# EAGLE board Qwiic Joystick-Panel (EAGLE 9.0.1), part 1 of 2
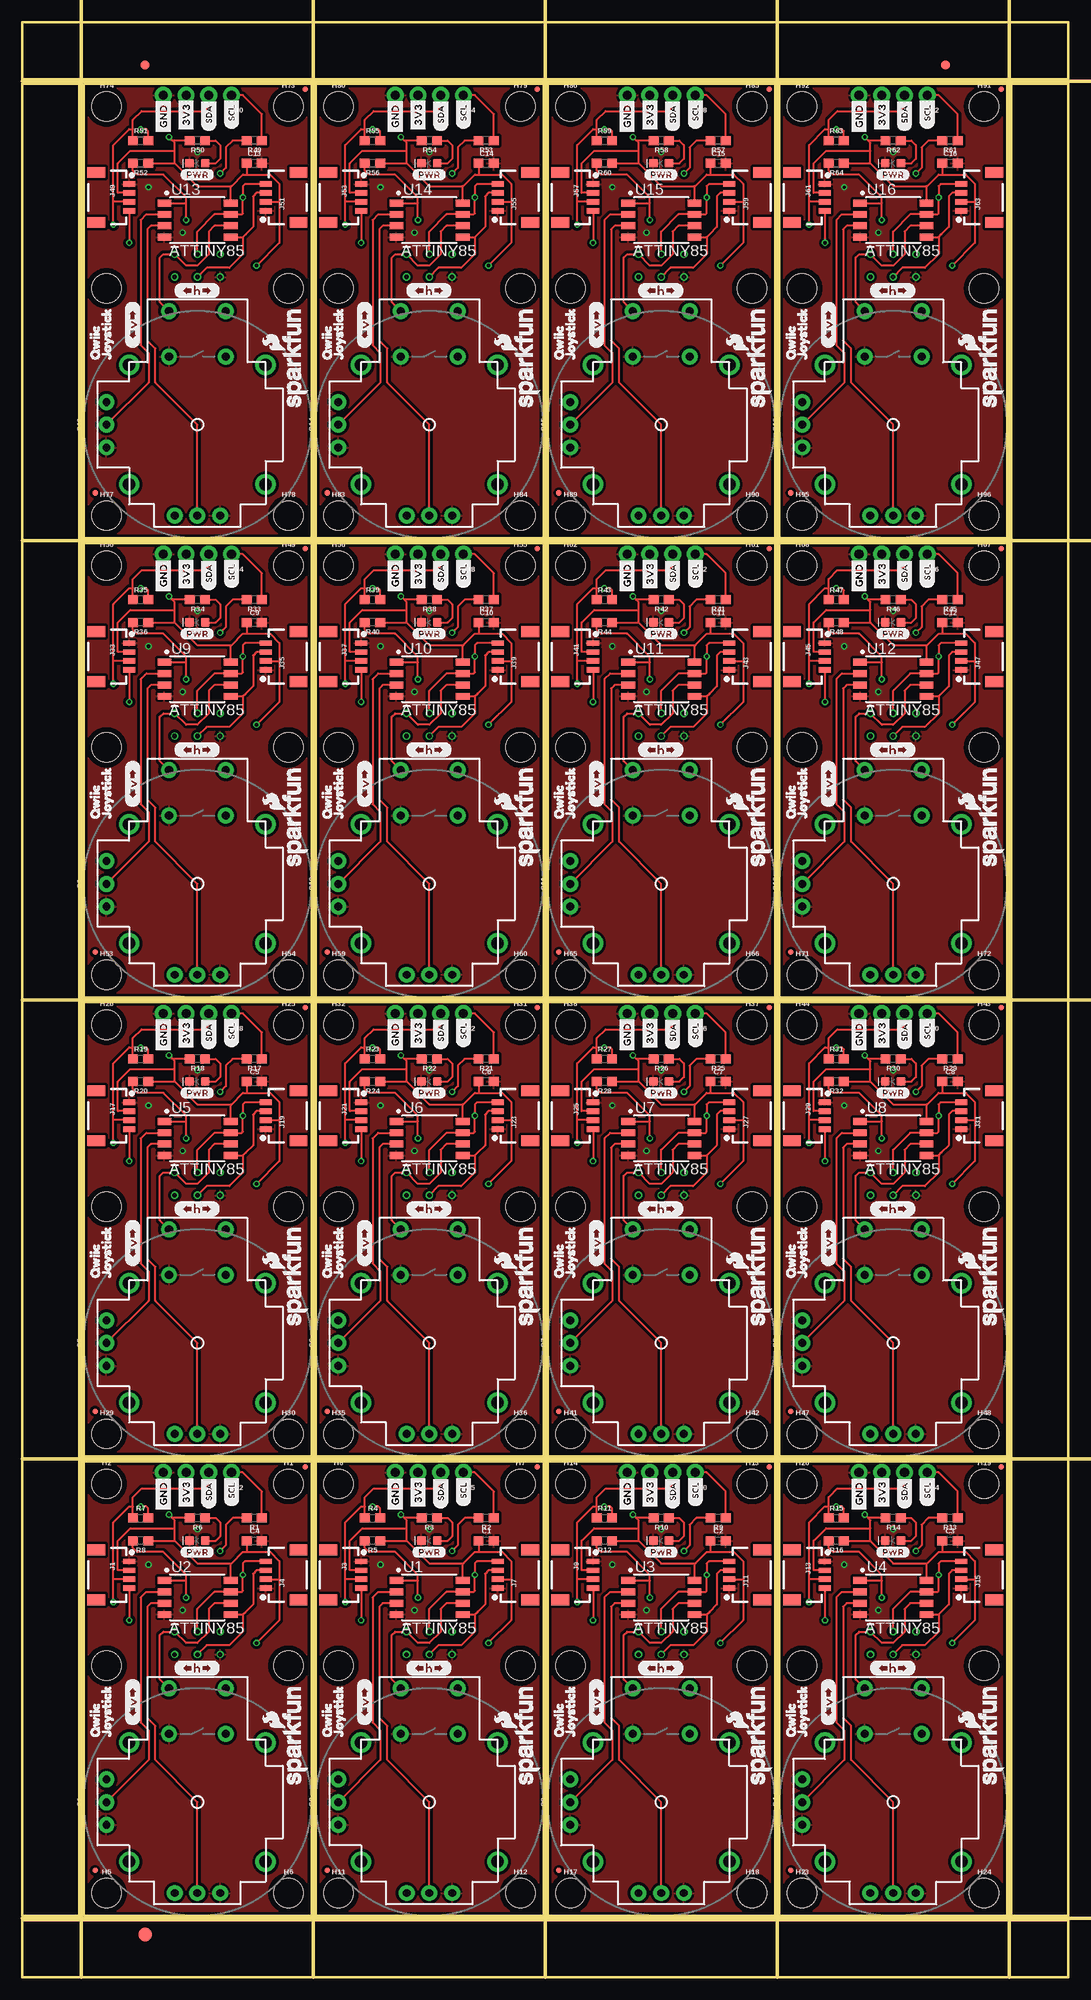
[diagram p0: board, top side]
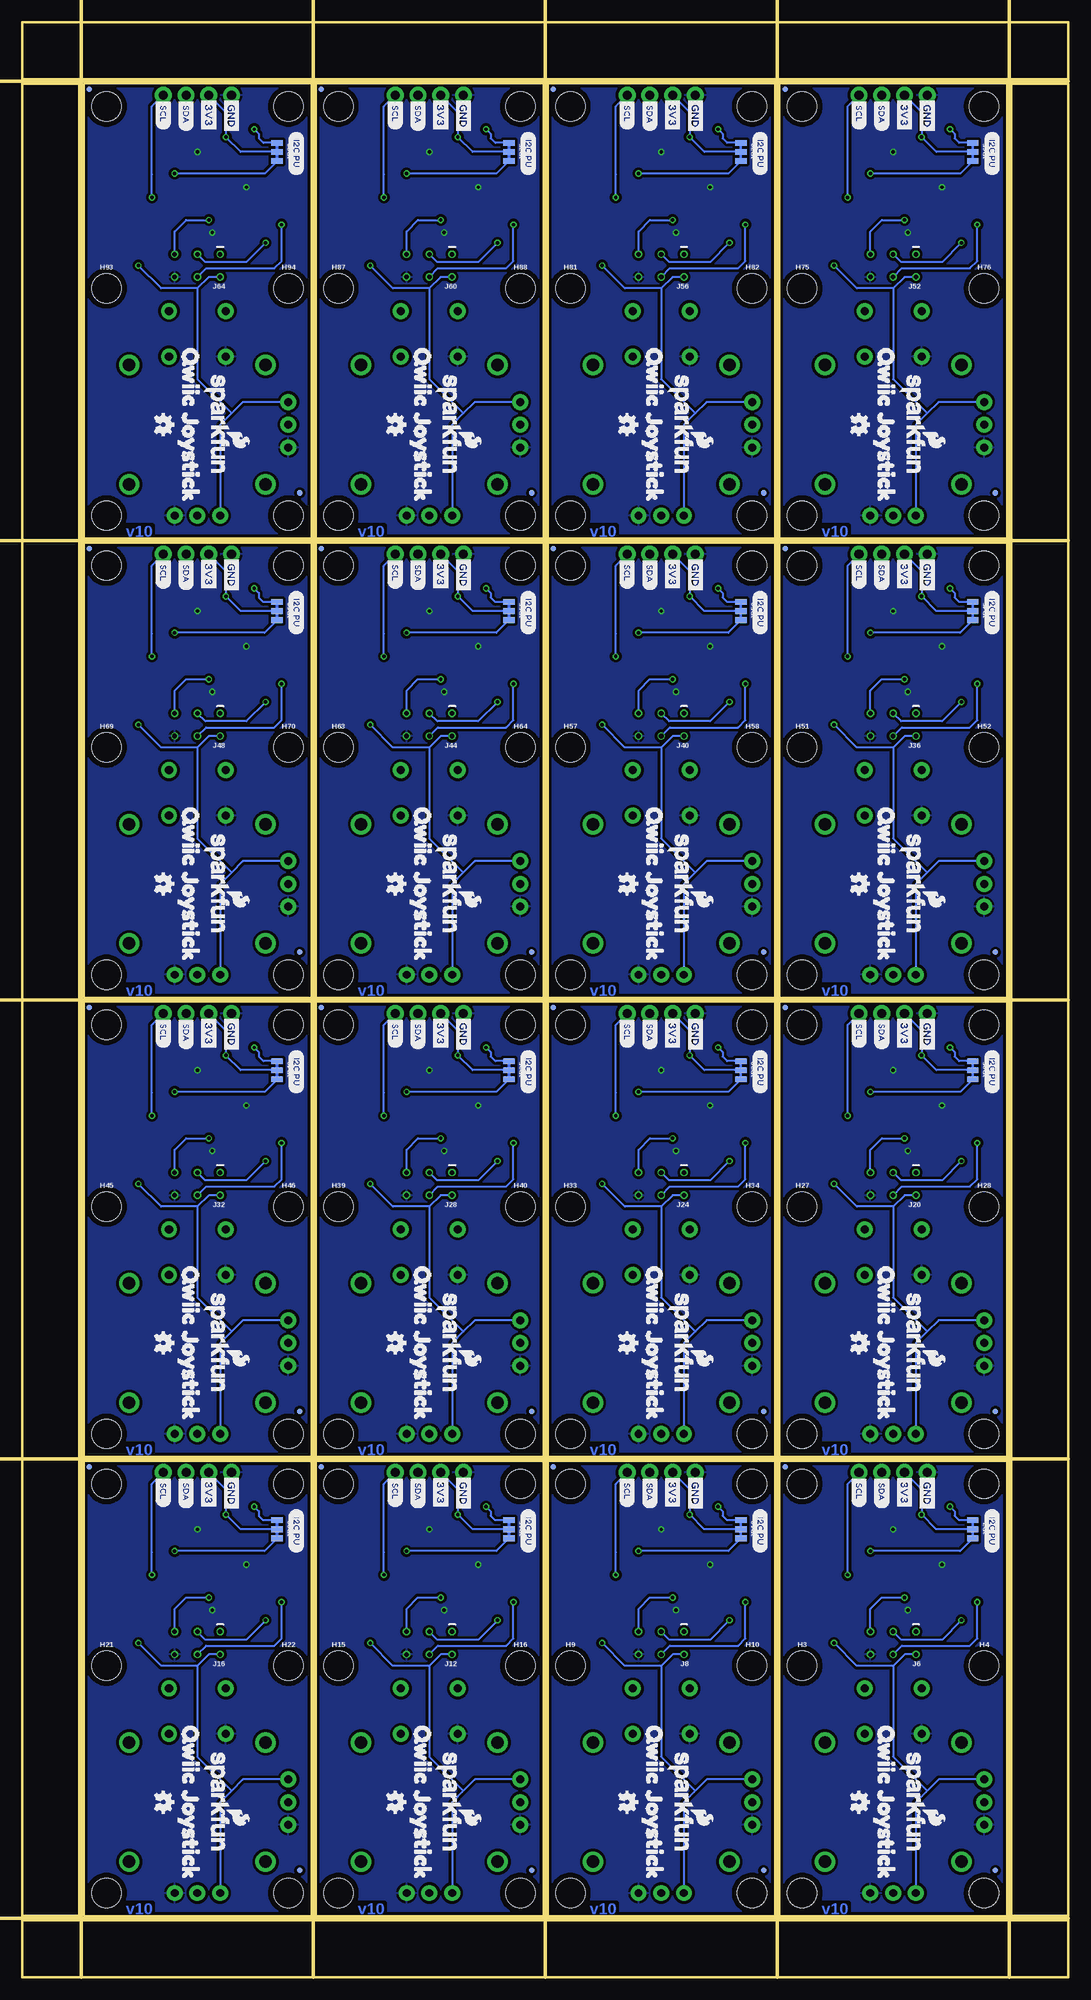
[diagram p1: board, bottom side, seen from below]

Size 116.84 x 218.44 mm. Coordinates in mm from the lower left corner, seen from the top.
Outline: 6.86,57.66 6.86,6.86 32.26,6.86 32.26,57.66 6.86,57.66
Outline: 32.77,57.66 32.77,6.86 58.17,6.86 58.17,57.66 32.77,57.66
Outline: 58.67,57.66 58.67,6.86 84.07,6.86 84.07,57.66 58.67,57.66
Outline: 84.58,57.66 84.58,6.86 109.98,6.86 109.98,57.66 84.58,57.66
Outline: 6.86,108.97 6.86,58.17 32.26,58.17 32.26,108.97 6.86,108.97
Outline: 32.77,108.97 32.77,58.17 58.17,58.17 58.17,108.97 32.77,108.97
Outline: 58.67,108.97 58.67,58.17 84.07,58.17 84.07,108.97 58.67,108.97
Outline: 84.58,108.97 84.58,58.17 109.98,58.17 109.98,108.97 84.58,108.97
Outline: 6.86,160.27 6.86,109.47 32.26,109.47 32.26,160.27 6.86,160.27
Outline: 32.77,160.27 32.77,109.47 58.17,109.47 58.17,160.27 32.77,160.27
Outline: 58.67,160.27 58.67,109.47 84.07,109.47 84.07,160.27 58.67,160.27
Outline: 84.58,160.27 84.58,109.47 109.98,109.47 109.98,160.27 84.58,160.27
Outline: 6.86,211.58 6.86,160.78 32.26,160.78 32.26,211.58 6.86,211.58
Outline: 32.77,211.58 32.77,160.78 58.17,160.78 58.17,211.58 32.77,211.58
Outline: 58.67,211.58 58.67,160.78 84.07,160.78 84.07,211.58 58.67,211.58
Outline: 84.58,211.58 84.58,160.78 109.98,160.78 109.98,211.58 84.58,211.58
Outline: 0,6.35 116.84,6.35 116.84,0 0,0 0,6.35
Outline: 110.49,211.58 116.84,211.58 116.84,6.86 110.49,6.86 110.49,211.58
Outline: 0,218.44 116.84,218.44 116.84,212.09 0,212.09 0,218.44
Outline: 0,211.58 6.35,211.58 6.35,6.86 0,6.86 0,211.58
Copper layers (1*16): Top 0.035mm / dielectric 1.5mm / Bottom 0.035mm
Design rules "SparkFun-2-layer-PCBWay-LIMIT": minimum track width 6mil, minimum drill 0.3mm, track to track 6mil, track to pad 6mil, pad to pad 6mil, via to via 6mil, smd to smd 6mil, copper to edge 6mil, drill to drill 6mil, minimum pad ring 6mil, minimum via ring 6mil, stop-mask expansion 4mil, vias tented up to drill 25mil, thermal gap 10mil
Milling: 10 lines

## Footprints (pad centres in the part's own frame; a part is rotated, then mirrored left to right if it is on the bottom)
0603 = smd 1.1 x 1: 1 -0.85,0; 2 0.85,0
LED-0603 = smd 1 x 1: A -0.877,0; C 0.877,0
FIDUCIAL-1X2 = smd 1 x 1: 1 0,0
FIDUCIAL-1.5X3 = smd 1.5 x 1.5: 1 0,0
STAND-OFF = hole 3.302: 0,0
1X04_1MM_RA = smd 0.6 x 1.35: 1 -1.5,0; 2 -0.5,0; 3 0.5,0; 4 1.5,0 | smd 1.2 x 2: NC1 2.8,-3.675; NC2 -2.8,-3.675
1X04_NO_SILK = drill 1.016 pad 1.88: 1 0,0; 2 2.54,0; 3 5.08,0; 4 7.62,0
2X3_TEST_POINTS = drill 0.508: 1 -2.54,-1.27; 2 -2.54,1.27; 3 0,-1.27; 4 0,1.27; 5 2.54,-1.27; 6 2.54,1.27
MICRO-FIDUCIAL = smd 0.635 x 0.635: 1 0,0
SMT-JUMPER_3_2-NC_TRACE_NO-SILK = smd 0.635 x 1.27: 1 -1.016,0; 2 0,0; 3 1.016,0
JOYSTICK = drill 0.9 pad 1.778: B1A -3.175,12.7; B1B 3.175,12.7; B2A -3.175,7.62; B2B 3.175,7.62 | drill 0.889 pad 1.778: H1 -2.54,-10.16; H2 0,-10.16; H3 2.54,-10.16; V1 -10.16,2.54; V2 -10.16,0; V3 -10.16,-2.54 | drill 1.397 pad 2.286: MOUNT1 -7.62,6.668; MOUNT2 -7.62,-6.668; MOUNT3 7.62,-6.668; MOUNT4 7.62,6.668
ATTINY85 = smd 1.524 x 0.762: 1 -3.683,1.905; 2 -3.683,0.635; 3 -3.683,-0.635; 4 -3.683,-1.905; 5 3.727,-1.905; 6 3.727,-0.635; 7 3.727,0.635; 8 3.727,1.905

## Placement (x,y rotation side)
C1  0.1uF  [0603]  51.82,48.77 0 top
C2  0.1uF  [0603]  77.72,48.77 0 top
C3  0.1uF  [0603]  103.63,48.77 0 top
C4  0.1uF  [0603]  25.91,48.77 0 top
C5  0.1uF  [0603]  25.91,100.08 0 top
C6  0.1uF  [0603]  51.82,100.08 0 top
C7  0.1uF  [0603]  77.72,100.08 0 top
C8  0.1uF  [0603]  103.63,100.08 0 top
C9  0.1uF  [0603]  25.91,151.38 0 top
C10  0.1uF  [0603]  51.82,151.38 0 top
C11  0.1uF  [0603]  77.72,151.38 0 top
C12  0.1uF  [0603]  103.63,151.38 0 top
C13  0.1uF  [0603]  25.91,202.69 0 top
C14  0.1uF  [0603]  51.82,202.69 0 top
C15  0.1uF  [0603]  77.72,202.69 0 top
C16  0.1uF  [0603]  103.63,202.69 0 top
D1  RED  [LED-0603]  19.56,48.77 180 top
D2  RED  [LED-0603]  45.47,48.77 180 top
D3  RED  [LED-0603]  71.37,48.77 180 top
D4  RED  [LED-0603]  97.28,48.77 180 top
D5  RED  [LED-0603]  19.56,100.08 180 top
D6  RED  [LED-0603]  45.47,100.08 180 top
D7  RED  [LED-0603]  71.37,100.08 180 top
D8  RED  [LED-0603]  97.28,100.08 180 top
D9  RED  [LED-0603]  19.56,151.38 180 top
D10  RED  [LED-0603]  45.47,151.38 180 top
D11  RED  [LED-0603]  71.37,151.38 180 top
D12  RED  [LED-0603]  97.28,151.38 180 top
D13  RED  [LED-0603]  19.56,202.69 180 top
D14  RED  [LED-0603]  45.47,202.69 180 top
D15  RED  [LED-0603]  71.37,202.69 180 top
D16  RED  [LED-0603]  97.28,202.69 180 top
E$1  [FIDUCIAL-1X2]  13.72,213.68 0 top
E$2  [FIDUCIAL-1X2]  103.12,213.68 0 top
E$3  [FIDUCIAL-1.5X3]  13.72,4.76 0 top
H1  STAND-OFF  [STAND-OFF]  29.72,55.12 0 top
H2  STAND-OFF  [STAND-OFF]  9.4,55.12 0 top
H3  STAND-OFF  [STAND-OFF]  29.72,34.8 0 bottom
H4  STAND-OFF  [STAND-OFF]  9.4,34.8 0 bottom
H5  STAND-OFF  [STAND-OFF]  9.4,9.4 0 top
H6  STAND-OFF  [STAND-OFF]  29.72,9.4 0 top
H7  STAND-OFF  [STAND-OFF]  55.63,55.12 0 top
H8  STAND-OFF  [STAND-OFF]  35.31,55.12 0 top
H9  STAND-OFF  [STAND-OFF]  55.63,34.8 0 bottom
H10  STAND-OFF  [STAND-OFF]  35.31,34.8 0 bottom
H11  STAND-OFF  [STAND-OFF]  35.31,9.4 0 top
H12  STAND-OFF  [STAND-OFF]  55.63,9.4 0 top
H13  STAND-OFF  [STAND-OFF]  81.53,55.12 0 top
H14  STAND-OFF  [STAND-OFF]  61.21,55.12 0 top
H15  STAND-OFF  [STAND-OFF]  81.53,34.8 0 bottom
H16  STAND-OFF  [STAND-OFF]  61.21,34.8 0 bottom
H17  STAND-OFF  [STAND-OFF]  61.21,9.4 0 top
H18  STAND-OFF  [STAND-OFF]  81.53,9.4 0 top
H19  STAND-OFF  [STAND-OFF]  107.44,55.12 0 top
H20  STAND-OFF  [STAND-OFF]  87.12,55.12 0 top
H21  STAND-OFF  [STAND-OFF]  107.44,34.8 0 bottom
H22  STAND-OFF  [STAND-OFF]  87.12,34.8 0 bottom
H23  STAND-OFF  [STAND-OFF]  87.12,9.4 0 top
H24  STAND-OFF  [STAND-OFF]  107.44,9.4 0 top
H25  STAND-OFF  [STAND-OFF]  29.72,106.43 0 top
H26  STAND-OFF  [STAND-OFF]  9.4,106.43 0 top
H27  STAND-OFF  [STAND-OFF]  29.72,86.11 0 bottom
H28  STAND-OFF  [STAND-OFF]  9.4,86.11 0 bottom
H29  STAND-OFF  [STAND-OFF]  9.4,60.71 0 top
H30  STAND-OFF  [STAND-OFF]  29.72,60.71 0 top
H31  STAND-OFF  [STAND-OFF]  55.63,106.43 0 top
H32  STAND-OFF  [STAND-OFF]  35.31,106.43 0 top
H33  STAND-OFF  [STAND-OFF]  55.63,86.11 0 bottom
H34  STAND-OFF  [STAND-OFF]  35.31,86.11 0 bottom
H35  STAND-OFF  [STAND-OFF]  35.31,60.71 0 top
H36  STAND-OFF  [STAND-OFF]  55.63,60.71 0 top
H37  STAND-OFF  [STAND-OFF]  81.53,106.43 0 top
H38  STAND-OFF  [STAND-OFF]  61.21,106.43 0 top
H39  STAND-OFF  [STAND-OFF]  81.53,86.11 0 bottom
H40  STAND-OFF  [STAND-OFF]  61.21,86.11 0 bottom
H41  STAND-OFF  [STAND-OFF]  61.21,60.71 0 top
H42  STAND-OFF  [STAND-OFF]  81.53,60.71 0 top
H43  STAND-OFF  [STAND-OFF]  107.44,106.43 0 top
H44  STAND-OFF  [STAND-OFF]  87.12,106.43 0 top
H45  STAND-OFF  [STAND-OFF]  107.44,86.11 0 bottom
H46  STAND-OFF  [STAND-OFF]  87.12,86.11 0 bottom
H47  STAND-OFF  [STAND-OFF]  87.12,60.71 0 top
H48  STAND-OFF  [STAND-OFF]  107.44,60.71 0 top
H49  STAND-OFF  [STAND-OFF]  29.72,157.73 0 top
H50  STAND-OFF  [STAND-OFF]  9.4,157.73 0 top
H51  STAND-OFF  [STAND-OFF]  29.72,137.41 0 bottom
H52  STAND-OFF  [STAND-OFF]  9.4,137.41 0 bottom
H53  STAND-OFF  [STAND-OFF]  9.4,112.01 0 top
H54  STAND-OFF  [STAND-OFF]  29.72,112.01 0 top
H55  STAND-OFF  [STAND-OFF]  55.63,157.73 0 top
H56  STAND-OFF  [STAND-OFF]  35.31,157.73 0 top
H57  STAND-OFF  [STAND-OFF]  55.63,137.41 0 bottom
H58  STAND-OFF  [STAND-OFF]  35.31,137.41 0 bottom
H59  STAND-OFF  [STAND-OFF]  35.31,112.01 0 top
H60  STAND-OFF  [STAND-OFF]  55.63,112.01 0 top
H61  STAND-OFF  [STAND-OFF]  81.53,157.73 0 top
H62  STAND-OFF  [STAND-OFF]  61.21,157.73 0 top
H63  STAND-OFF  [STAND-OFF]  81.53,137.41 0 bottom
H64  STAND-OFF  [STAND-OFF]  61.21,137.41 0 bottom
H65  STAND-OFF  [STAND-OFF]  61.21,112.01 0 top
H66  STAND-OFF  [STAND-OFF]  81.53,112.01 0 top
H67  STAND-OFF  [STAND-OFF]  107.44,157.73 0 top
H68  STAND-OFF  [STAND-OFF]  87.12,157.73 0 top
H69  STAND-OFF  [STAND-OFF]  107.44,137.41 0 bottom
H70  STAND-OFF  [STAND-OFF]  87.12,137.41 0 bottom
H71  STAND-OFF  [STAND-OFF]  87.12,112.01 0 top
H72  STAND-OFF  [STAND-OFF]  107.44,112.01 0 top
H73  STAND-OFF  [STAND-OFF]  29.72,209.04 0 top
H74  STAND-OFF  [STAND-OFF]  9.4,209.04 0 top
H75  STAND-OFF  [STAND-OFF]  29.72,188.72 0 bottom
H76  STAND-OFF  [STAND-OFF]  9.4,188.72 0 bottom
H77  STAND-OFF  [STAND-OFF]  9.4,163.32 0 top
H78  STAND-OFF  [STAND-OFF]  29.72,163.32 0 top
H79  STAND-OFF  [STAND-OFF]  55.63,209.04 0 top
H80  STAND-OFF  [STAND-OFF]  35.31,209.04 0 top
H81  STAND-OFF  [STAND-OFF]  55.63,188.72 0 bottom
H82  STAND-OFF  [STAND-OFF]  35.31,188.72 0 bottom
H83  STAND-OFF  [STAND-OFF]  35.31,163.32 0 top
H84  STAND-OFF  [STAND-OFF]  55.63,163.32 0 top
H85  STAND-OFF  [STAND-OFF]  81.53,209.04 0 top
H86  STAND-OFF  [STAND-OFF]  61.21,209.04 0 top
H87  STAND-OFF  [STAND-OFF]  81.53,188.72 0 bottom
H88  STAND-OFF  [STAND-OFF]  61.21,188.72 0 bottom
H89  STAND-OFF  [STAND-OFF]  61.21,163.32 0 top
H90  STAND-OFF  [STAND-OFF]  81.53,163.32 0 top
H91  STAND-OFF  [STAND-OFF]  107.44,209.04 0 top
H92  STAND-OFF  [STAND-OFF]  87.12,209.04 0 top
H93  STAND-OFF  [STAND-OFF]  107.44,188.72 0 bottom
H94  STAND-OFF  [STAND-OFF]  87.12,188.72 0 bottom
H95  STAND-OFF  [STAND-OFF]  87.12,163.32 0 top
H96  STAND-OFF  [STAND-OFF]  107.44,163.32 0 top
J1  [1X04_1MM_RA]  11.94,44.96 270 top
J2  [1X04_NO_SILK]  23.37,56.39 180 top
J3  [1X04_1MM_RA]  37.85,44.96 270 top
J4  [1X04_1MM_RA]  27.18,44.96 90 top
J5  [1X04_NO_SILK]  49.28,56.39 180 top
J6  AVR_SPI_PROG_3X2TESTPOINTS  [2X3_TEST_POINTS]  19.56,37.34 180 bottom
J7  [1X04_1MM_RA]  53.09,44.96 90 top
J8  AVR_SPI_PROG_3X2TESTPOINTS  [2X3_TEST_POINTS]  45.47,37.34 180 bottom
J9  [1X04_1MM_RA]  63.75,44.96 270 top
J10  [1X04_NO_SILK]  75.18,56.39 180 top
J11  [1X04_1MM_RA]  78.99,44.96 90 top
J12  AVR_SPI_PROG_3X2TESTPOINTS  [2X3_TEST_POINTS]  71.37,37.34 180 bottom
J13  [1X04_1MM_RA]  89.66,44.96 270 top
J14  [1X04_NO_SILK]  101.09,56.39 180 top
J15  [1X04_1MM_RA]  104.9,44.96 90 top
J16  AVR_SPI_PROG_3X2TESTPOINTS  [2X3_TEST_POINTS]  97.28,37.34 180 bottom
J17  [1X04_1MM_RA]  11.94,96.27 270 top
J18  [1X04_NO_SILK]  23.37,107.7 180 top
J19  [1X04_1MM_RA]  27.18,96.27 90 top
J20  AVR_SPI_PROG_3X2TESTPOINTS  [2X3_TEST_POINTS]  19.56,88.65 180 bottom
J21  [1X04_1MM_RA]  37.85,96.27 270 top
J22  [1X04_NO_SILK]  49.28,107.7 180 top
J23  [1X04_1MM_RA]  53.09,96.27 90 top
J24  AVR_SPI_PROG_3X2TESTPOINTS  [2X3_TEST_POINTS]  45.47,88.65 180 bottom
J25  [1X04_1MM_RA]  63.75,96.27 270 top
J26  [1X04_NO_SILK]  75.18,107.7 180 top
J27  [1X04_1MM_RA]  78.99,96.27 90 top
J28  AVR_SPI_PROG_3X2TESTPOINTS  [2X3_TEST_POINTS]  71.37,88.65 180 bottom
J29  [1X04_1MM_RA]  89.66,96.27 270 top
J30  [1X04_NO_SILK]  101.09,107.7 180 top
J31  [1X04_1MM_RA]  104.9,96.27 90 top
J32  AVR_SPI_PROG_3X2TESTPOINTS  [2X3_TEST_POINTS]  97.28,88.65 180 bottom
J33  [1X04_1MM_RA]  11.94,147.57 270 top
J34  [1X04_NO_SILK]  23.37,159 180 top
J35  [1X04_1MM_RA]  27.18,147.57 90 top
J36  AVR_SPI_PROG_3X2TESTPOINTS  [2X3_TEST_POINTS]  19.56,139.95 180 bottom
J37  [1X04_1MM_RA]  37.85,147.57 270 top
J38  [1X04_NO_SILK]  49.28,159 180 top
J39  [1X04_1MM_RA]  53.09,147.57 90 top
J40  AVR_SPI_PROG_3X2TESTPOINTS  [2X3_TEST_POINTS]  45.47,139.95 180 bottom
J41  [1X04_1MM_RA]  63.75,147.57 270 top
J42  [1X04_NO_SILK]  75.18,159 180 top
J43  [1X04_1MM_RA]  78.99,147.57 90 top
J44  AVR_SPI_PROG_3X2TESTPOINTS  [2X3_TEST_POINTS]  71.37,139.95 180 bottom
J45  [1X04_1MM_RA]  89.66,147.57 270 top
J46  [1X04_NO_SILK]  101.09,159 180 top
J47  [1X04_1MM_RA]  104.9,147.57 90 top
J48  AVR_SPI_PROG_3X2TESTPOINTS  [2X3_TEST_POINTS]  97.28,139.95 180 bottom
J49  [1X04_1MM_RA]  11.94,198.88 270 top
J50  [1X04_NO_SILK]  23.37,210.31 180 top
J51  [1X04_1MM_RA]  27.18,198.88 90 top
J52  AVR_SPI_PROG_3X2TESTPOINTS  [2X3_TEST_POINTS]  19.56,191.26 180 bottom
J53  [1X04_1MM_RA]  37.85,198.88 270 top
J54  [1X04_NO_SILK]  49.28,210.31 180 top
J55  [1X04_1MM_RA]  53.09,198.88 90 top
J56  AVR_SPI_PROG_3X2TESTPOINTS  [2X3_TEST_POINTS]  45.47,191.26 180 bottom
J57  [1X04_1MM_RA]  63.75,198.88 270 top
J58  [1X04_NO_SILK]  75.18,210.31 180 top
J59  [1X04_1MM_RA]  78.99,198.88 90 top
J60  AVR_SPI_PROG_3X2TESTPOINTS  [2X3_TEST_POINTS]  71.37,191.26 180 bottom
J61  [1X04_1MM_RA]  89.66,198.88 270 top
J62  [1X04_NO_SILK]  101.09,210.31 180 top
J63  [1X04_1MM_RA]  104.9,198.88 90 top
J64  AVR_SPI_PROG_3X2TESTPOINTS  [2X3_TEST_POINTS]  97.28,191.26 180 bottom
JP1  FIDUCIALUFIDUCIAL  [MICRO-FIDUCIAL]  31.62,57.02 270 top
JP2  FIDUCIALUFIDUCIAL  [MICRO-FIDUCIAL]  8.13,11.94 0 top
JP3  FIDUCIALUFIDUCIAL  [MICRO-FIDUCIAL]  8.13,11.94 270 bottom
JP4  FIDUCIALUFIDUCIAL  [MICRO-FIDUCIAL]  57.53,57.02 270 top
JP5  FIDUCIALUFIDUCIAL  [MICRO-FIDUCIAL]  34.04,11.94 0 top
JP6  FIDUCIALUFIDUCIAL  [MICRO-FIDUCIAL]  31.62,57.02 270 bottom
JP7  JUMPER-SMT_3_2-NC_TRACE_NO-SILK  [SMT-JUMPER_3_2-NC_TRACE_NO-SILK]  10.67,50.04 270 bottom
JP8  FIDUCIALUFIDUCIAL  [MICRO-FIDUCIAL]  34.04,11.94 270 bottom
JP9  FIDUCIALUFIDUCIAL  [MICRO-FIDUCIAL]  57.53,57.02 270 bottom
JP10  JUMPER-SMT_3_2-NC_TRACE_NO-SILK  [SMT-JUMPER_3_2-NC_TRACE_NO-SILK]  36.58,50.04 270 bottom
JP11  FIDUCIALUFIDUCIAL  [MICRO-FIDUCIAL]  83.44,57.02 270 top
JP12  FIDUCIALUFIDUCIAL  [MICRO-FIDUCIAL]  59.94,11.94 0 top
JP13  FIDUCIALUFIDUCIAL  [MICRO-FIDUCIAL]  59.94,11.94 270 bottom
JP14  FIDUCIALUFIDUCIAL  [MICRO-FIDUCIAL]  83.44,57.02 270 bottom
JP15  JUMPER-SMT_3_2-NC_TRACE_NO-SILK  [SMT-JUMPER_3_2-NC_TRACE_NO-SILK]  62.48,50.04 270 bottom
JP16  FIDUCIALUFIDUCIAL  [MICRO-FIDUCIAL]  109.35,57.02 270 top
JP17  FIDUCIALUFIDUCIAL  [MICRO-FIDUCIAL]  85.85,11.94 0 top
JP18  FIDUCIALUFIDUCIAL  [MICRO-FIDUCIAL]  85.85,11.94 270 bottom
JP19  FIDUCIALUFIDUCIAL  [MICRO-FIDUCIAL]  109.35,57.02 270 bottom
JP20  JUMPER-SMT_3_2-NC_TRACE_NO-SILK  [SMT-JUMPER_3_2-NC_TRACE_NO-SILK]  88.39,50.04 270 bottom
JP21  FIDUCIALUFIDUCIAL  [MICRO-FIDUCIAL]  31.62,108.33 270 top
JP22  FIDUCIALUFIDUCIAL  [MICRO-FIDUCIAL]  8.13,63.25 0 top
JP23  FIDUCIALUFIDUCIAL  [MICRO-FIDUCIAL]  8.13,63.25 270 bottom
JP24  FIDUCIALUFIDUCIAL  [MICRO-FIDUCIAL]  31.62,108.33 270 bottom
JP25  JUMPER-SMT_3_2-NC_TRACE_NO-SILK  [SMT-JUMPER_3_2-NC_TRACE_NO-SILK]  10.67,101.35 270 bottom
JP26  FIDUCIALUFIDUCIAL  [MICRO-FIDUCIAL]  57.53,108.33 270 top
JP27  FIDUCIALUFIDUCIAL  [MICRO-FIDUCIAL]  34.04,63.25 0 top
JP28  FIDUCIALUFIDUCIAL  [MICRO-FIDUCIAL]  34.04,63.25 270 bottom
JP29  FIDUCIALUFIDUCIAL  [MICRO-FIDUCIAL]  57.53,108.33 270 bottom
JP30  JUMPER-SMT_3_2-NC_TRACE_NO-SILK  [SMT-JUMPER_3_2-NC_TRACE_NO-SILK]  36.58,101.35 270 bottom
JP31  FIDUCIALUFIDUCIAL  [MICRO-FIDUCIAL]  83.44,108.33 270 top
JP32  FIDUCIALUFIDUCIAL  [MICRO-FIDUCIAL]  59.94,63.25 0 top
JP33  FIDUCIALUFIDUCIAL  [MICRO-FIDUCIAL]  59.94,63.25 270 bottom
JP34  FIDUCIALUFIDUCIAL  [MICRO-FIDUCIAL]  83.44,108.33 270 bottom
JP35  JUMPER-SMT_3_2-NC_TRACE_NO-SILK  [SMT-JUMPER_3_2-NC_TRACE_NO-SILK]  62.48,101.35 270 bottom
JP36  FIDUCIALUFIDUCIAL  [MICRO-FIDUCIAL]  109.35,108.33 270 top
JP37  FIDUCIALUFIDUCIAL  [MICRO-FIDUCIAL]  85.85,63.25 0 top
JP38  FIDUCIALUFIDUCIAL  [MICRO-FIDUCIAL]  85.85,63.25 270 bottom
JP39  FIDUCIALUFIDUCIAL  [MICRO-FIDUCIAL]  109.35,108.33 270 bottom
JP40  JUMPER-SMT_3_2-NC_TRACE_NO-SILK  [SMT-JUMPER_3_2-NC_TRACE_NO-SILK]  88.39,101.35 270 bottom
JP41  FIDUCIALUFIDUCIAL  [MICRO-FIDUCIAL]  31.62,159.64 270 top
JP42  FIDUCIALUFIDUCIAL  [MICRO-FIDUCIAL]  8.13,114.55 0 top
JP43  FIDUCIALUFIDUCIAL  [MICRO-FIDUCIAL]  8.13,114.55 270 bottom
JP44  FIDUCIALUFIDUCIAL  [MICRO-FIDUCIAL]  31.62,159.64 270 bottom
JP45  JUMPER-SMT_3_2-NC_TRACE_NO-SILK  [SMT-JUMPER_3_2-NC_TRACE_NO-SILK]  10.67,152.65 270 bottom
JP46  FIDUCIALUFIDUCIAL  [MICRO-FIDUCIAL]  57.53,159.64 270 top
JP47  FIDUCIALUFIDUCIAL  [MICRO-FIDUCIAL]  34.04,114.55 0 top
JP48  FIDUCIALUFIDUCIAL  [MICRO-FIDUCIAL]  34.04,114.55 270 bottom
JP49  FIDUCIALUFIDUCIAL  [MICRO-FIDUCIAL]  57.53,159.64 270 bottom
JP50  JUMPER-SMT_3_2-NC_TRACE_NO-SILK  [SMT-JUMPER_3_2-NC_TRACE_NO-SILK]  36.58,152.65 270 bottom
JP51  FIDUCIALUFIDUCIAL  [MICRO-FIDUCIAL]  83.44,159.64 270 top
JP52  FIDUCIALUFIDUCIAL  [MICRO-FIDUCIAL]  59.94,114.55 0 top
JP53  FIDUCIALUFIDUCIAL  [MICRO-FIDUCIAL]  59.94,114.55 270 bottom
JP54  FIDUCIALUFIDUCIAL  [MICRO-FIDUCIAL]  83.44,159.64 270 bottom
JP55  JUMPER-SMT_3_2-NC_TRACE_NO-SILK  [SMT-JUMPER_3_2-NC_TRACE_NO-SILK]  62.48,152.65 270 bottom
JP56  FIDUCIALUFIDUCIAL  [MICRO-FIDUCIAL]  109.35,159.64 270 top
JP57  FIDUCIALUFIDUCIAL  [MICRO-FIDUCIAL]  85.85,114.55 0 top
JP58  FIDUCIALUFIDUCIAL  [MICRO-FIDUCIAL]  85.85,114.55 270 bottom
JP59  FIDUCIALUFIDUCIAL  [MICRO-FIDUCIAL]  109.35,159.64 270 bottom
JP60  JUMPER-SMT_3_2-NC_TRACE_NO-SILK  [SMT-JUMPER_3_2-NC_TRACE_NO-SILK]  88.39,152.65 270 bottom
JP61  FIDUCIALUFIDUCIAL  [MICRO-FIDUCIAL]  31.62,210.95 270 top
JP62  FIDUCIALUFIDUCIAL  [MICRO-FIDUCIAL]  8.13,165.86 0 top
JP63  FIDUCIALUFIDUCIAL  [MICRO-FIDUCIAL]  8.13,165.86 270 bottom
JP64  FIDUCIALUFIDUCIAL  [MICRO-FIDUCIAL]  31.62,210.95 270 bottom
JP65  JUMPER-SMT_3_2-NC_TRACE_NO-SILK  [SMT-JUMPER_3_2-NC_TRACE_NO-SILK]  10.67,203.96 270 bottom
JP66  FIDUCIALUFIDUCIAL  [MICRO-FIDUCIAL]  57.53,210.95 270 top
JP67  FIDUCIALUFIDUCIAL  [MICRO-FIDUCIAL]  34.04,165.86 0 top
JP68  FIDUCIALUFIDUCIAL  [MICRO-FIDUCIAL]  34.04,165.86 270 bottom
JP69  FIDUCIALUFIDUCIAL  [MICRO-FIDUCIAL]  57.53,210.95 270 bottom
JP70  JUMPER-SMT_3_2-NC_TRACE_NO-SILK  [SMT-JUMPER_3_2-NC_TRACE_NO-SILK]  36.58,203.96 270 bottom
JP71  FIDUCIALUFIDUCIAL  [MICRO-FIDUCIAL]  83.44,210.95 270 top
JP72  FIDUCIALUFIDUCIAL  [MICRO-FIDUCIAL]  59.94,165.86 0 top
JP73  FIDUCIALUFIDUCIAL  [MICRO-FIDUCIAL]  59.94,165.86 270 bottom
JP74  FIDUCIALUFIDUCIAL  [MICRO-FIDUCIAL]  83.44,210.95 270 bottom
JP75  JUMPER-SMT_3_2-NC_TRACE_NO-SILK  [SMT-JUMPER_3_2-NC_TRACE_NO-SILK]  62.48,203.96 270 bottom
JP76  FIDUCIALUFIDUCIAL  [MICRO-FIDUCIAL]  109.35,210.95 270 top
JP77  FIDUCIALUFIDUCIAL  [MICRO-FIDUCIAL]  85.85,165.86 0 top
JP78  FIDUCIALUFIDUCIAL  [MICRO-FIDUCIAL]  85.85,165.86 270 bottom
JP79  FIDUCIALUFIDUCIAL  [MICRO-FIDUCIAL]  109.35,210.95 270 bottom
JP80  JUMPER-SMT_3_2-NC_TRACE_NO-SILK  [SMT-JUMPER_3_2-NC_TRACE_NO-SILK]  88.39,203.96 270 bottom
LOGO1  OSHW-LOGOMINI  [OSHW-LOGO-MINI]  23.37,19.56 270 bottom
LOGO2  REVISION  [REVISION]  5.59,-8.38 0 top  (outside the outline)
LOGO3  OSHW-LOGOMINI  [OSHW-LOGO-MINI]  49.28,19.56 270 bottom
LOGO4  REVISION  [REVISION]  31.5,-8.38 0 top  (outside the outline)
LOGO5  OSHW-LOGOMINI  [OSHW-LOGO-MINI]  75.18,19.56 270 bottom
LOGO6  REVISION  [REVISION]  57.4,-8.38 0 top  (outside the outline)
LOGO7  OSHW-LOGOMINI  [OSHW-LOGO-MINI]  101.09,19.56 270 bottom
LOGO8  REVISION  [REVISION]  83.31,-8.38 0 top  (outside the outline)
LOGO9  OSHW-LOGOMINI  [OSHW-LOGO-MINI]  23.37,70.87 270 bottom
LOGO10  REVISION  [REVISION]  5.59,42.93 0 top
LOGO11  OSHW-LOGOMINI  [OSHW-LOGO-MINI]  49.28,70.87 270 bottom
LOGO12  REVISION  [REVISION]  31.5,42.93 0 top
LOGO13  OSHW-LOGOMINI  [OSHW-LOGO-MINI]  75.18,70.87 270 bottom
LOGO14  REVISION  [REVISION]  57.4,42.93 0 top
LOGO15  OSHW-LOGOMINI  [OSHW-LOGO-MINI]  101.09,70.87 270 bottom
LOGO16  REVISION  [REVISION]  83.31,42.93 0 top
LOGO17  OSHW-LOGOMINI  [OSHW-LOGO-MINI]  23.37,122.17 270 bottom
LOGO18  REVISION  [REVISION]  5.59,94.23 0 top
LOGO19  OSHW-LOGOMINI  [OSHW-LOGO-MINI]  49.28,122.17 270 bottom
LOGO20  REVISION  [REVISION]  31.5,94.23 0 top
LOGO21  OSHW-LOGOMINI  [OSHW-LOGO-MINI]  75.18,122.17 270 bottom
LOGO22  REVISION  [REVISION]  57.4,94.23 0 top
LOGO23  OSHW-LOGOMINI  [OSHW-LOGO-MINI]  101.09,122.17 270 bottom
LOGO24  REVISION  [REVISION]  83.31,94.23 0 top
LOGO25  OSHW-LOGOMINI  [OSHW-LOGO-MINI]  23.37,173.48 270 bottom
LOGO26  REVISION  [REVISION]  5.59,145.54 0 top
LOGO27  OSHW-LOGOMINI  [OSHW-LOGO-MINI]  49.28,173.48 270 bottom
LOGO28  REVISION  [REVISION]  31.5,145.54 0 top
LOGO29  OSHW-LOGOMINI  [OSHW-LOGO-MINI]  75.18,173.48 270 bottom
LOGO30  REVISION  [REVISION]  57.4,145.54 0 top
LOGO31  OSHW-LOGOMINI  [OSHW-LOGO-MINI]  101.09,173.48 270 bottom
LOGO32  REVISION  [REVISION]  83.31,145.54 0 top
R1  2.2k  [0603]  25.91,51.31 180 top
R2  2.2k  [0603]  51.82,51.31 180 top
R3  1k  [0603]  45.47,51.31 180 top
R4  2.2k  [0603]  39.12,51.31 0 top
R5  10k  [0603]  39.12,48.77 180 top
R6  1k  [0603]  19.56,51.31 180 top
R7  2.2k  [0603]  13.21,51.31 0 top
R8  10k  [0603]  13.21,48.77 180 top
R9  2.2k  [0603]  77.72,51.31 180 top
R10  1k  [0603]  71.37,51.31 180 top
R11  2.2k  [0603]  65.02,51.31 0 top
R12  10k  [0603]  65.02,48.77 180 top
R13  2.2k  [0603]  103.63,51.31 180 top
R14  1k  [0603]  97.28,51.31 180 top
R15  2.2k  [0603]  90.93,51.31 0 top
R16  10k  [0603]  90.93,48.77 180 top
R17  2.2k  [0603]  25.91,102.62 180 top
R18  1k  [0603]  19.56,102.62 180 top
R19  2.2k  [0603]  13.21,102.62 0 top
R20  10k  [0603]  13.21,100.08 180 top
R21  2.2k  [0603]  51.82,102.62 180 top
R22  1k  [0603]  45.47,102.62 180 top
R23  2.2k  [0603]  39.12,102.62 0 top
R24  10k  [0603]  39.12,100.08 180 top
R25  2.2k  [0603]  77.72,102.62 180 top
R26  1k  [0603]  71.37,102.62 180 top
R27  2.2k  [0603]  65.02,102.62 0 top
R28  10k  [0603]  65.02,100.08 180 top
R29  2.2k  [0603]  103.63,102.62 180 top
R30  1k  [0603]  97.28,102.62 180 top
R31  2.2k  [0603]  90.93,102.62 0 top
R32  10k  [0603]  90.93,100.08 180 top
R33  2.2k  [0603]  25.91,153.92 180 top
R34  1k  [0603]  19.56,153.92 180 top
R35  2.2k  [0603]  13.21,153.92 0 top
R36  10k  [0603]  13.21,151.38 180 top
R37  2.2k  [0603]  51.82,153.92 180 top
R38  1k  [0603]  45.47,153.92 180 top
R39  2.2k  [0603]  39.12,153.92 0 top
R40  10k  [0603]  39.12,151.38 180 top
R41  2.2k  [0603]  77.72,153.92 180 top
R42  1k  [0603]  71.37,153.92 180 top
R43  2.2k  [0603]  65.02,153.92 0 top
R44  10k  [0603]  65.02,151.38 180 top
R45  2.2k  [0603]  103.63,153.92 180 top
R46  1k  [0603]  97.28,153.92 180 top
R47  2.2k  [0603]  90.93,153.92 0 top
R48  10k  [0603]  90.93,151.38 180 top
R49  2.2k  [0603]  25.91,205.23 180 top
R50  1k  [0603]  19.56,205.23 180 top
R51  2.2k  [0603]  13.21,205.23 0 top
R52  10k  [0603]  13.21,202.69 180 top
R53  2.2k  [0603]  51.82,205.23 180 top
R54  1k  [0603]  45.47,205.23 180 top
R55  2.2k  [0603]  39.12,205.23 0 top
R56  10k  [0603]  39.12,202.69 180 top
R57  2.2k  [0603]  77.72,205.23 180 top
R58  1k  [0603]  71.37,205.23 180 top
R59  2.2k  [0603]  65.02,205.23 0 top
R60  10k  [0603]  65.02,202.69 180 top
R61  2.2k  [0603]  103.63,205.23 180 top
R62  1k  [0603]  97.28,205.23 180 top
R63  2.2k  [0603]  90.93,205.23 0 top
R64  10k  [0603]  90.93,202.69 180 top
S1  JOYSTICK_THUMB  [JOYSTICK]  19.56,19.56 0 top
S2  JOYSTICK_THUMB  [JOYSTICK]  45.47,19.56 0 top
S3  JOYSTICK_THUMB  [JOYSTICK]  71.37,19.56 0 top
S4  JOYSTICK_THUMB  [JOYSTICK]  97.28,19.56 0 top
S5  JOYSTICK_THUMB  [JOYSTICK]  19.56,70.87 0 top
S6  JOYSTICK_THUMB  [JOYSTICK]  45.47,70.87 0 top
S7  JOYSTICK_THUMB  [JOYSTICK]  71.37,70.87 0 top
S8  JOYSTICK_THUMB  [JOYSTICK]  97.28,70.87 0 top
S9  JOYSTICK_THUMB  [JOYSTICK]  19.56,122.17 0 top
S10  JOYSTICK_THUMB  [JOYSTICK]  45.47,122.17 0 top
S11  JOYSTICK_THUMB  [JOYSTICK]  71.37,122.17 0 top
S12  JOYSTICK_THUMB  [JOYSTICK]  97.28,122.17 0 top
S13  JOYSTICK_THUMB  [JOYSTICK]  19.56,173.48 0 top
S14  JOYSTICK_THUMB  [JOYSTICK]  45.47,173.48 0 top
S15  JOYSTICK_THUMB  [JOYSTICK]  71.37,173.48 0 top
S16  JOYSTICK_THUMB  [JOYSTICK]  97.28,173.48 0 top
U1  ATTINY85  [ATTINY85]  45.47,42.42 0 top
U2  ATTINY85  [ATTINY85]  19.56,42.42 0 top
U3  ATTINY85  [ATTINY85]  71.37,42.42 0 top
U4  ATTINY85  [ATTINY85]  97.28,42.42 0 top
U5  ATTINY85  [ATTINY85]  19.56,93.73 0 top
U6  ATTINY85  [ATTINY85]  45.47,93.73 0 top
U7  ATTINY85  [ATTINY85]  71.37,93.73 0 top
U8  ATTINY85  [ATTINY85]  97.28,93.73 0 top
U9  ATTINY85  [ATTINY85]  19.56,145.03 0 top
U10  ATTINY85  [ATTINY85]  45.47,145.03 0 top
U11  ATTINY85  [ATTINY85]  71.37,145.03 0 top
U12  ATTINY85  [ATTINY85]  97.28,145.03 0 top
U13  ATTINY85  [ATTINY85]  19.56,196.34 0 top
U14  ATTINY85  [ATTINY85]  45.47,196.34 0 top
U15  ATTINY85  [ATTINY85]  71.37,196.34 0 top
U16  ATTINY85  [ATTINY85]  97.28,196.34 0 top
U$1  SFE_LOGO_NAME_FLAME.1_INCH  [SFE_LOGO_NAME_FLAME_.1]  17.4,19.56 270 bottom
U$2  SFE_LOGO_NAME_FLAME.1_INCH  [SFE_LOGO_NAME_FLAME_.1]  30.48,27.05 90 top
U$3  [QWIIC0]  8.13,25.91 90 top
U$4  [I2C_PU0]  8.51,52.32 270 bottom
U$5  [SDA0]  20.83,56.13 270 bottom
U$6  [GND4]  15.75,51.82 90 top
U$7  [##V##1]  12.32,28.07 90 top
U$8  [GND4]  15.75,56.26 270 bottom
U$9  [SCL1]  23.37,56.13 270 bottom
U$10  [JOYSTICK0]  9.4,25.91 90 top
U$11  [SCL3]  23.37,52.58 90 top
U$12  [SDA2]  20.83,52.32 90 top
U$13  [QWIIC_JOYSTICK1]  20.32,29.72 270 bottom
U$14  [PWR-()-03]  17.65,47.5 0 top
U$15  [##H##0]  16.89,34.54 0 top
U$16  [3V35]  18.29,52.07 90 top
U$17  [3V35]  18.29,56.26 270 bottom
U$18  SFE_LOGO_NAME_FLAME.1_INCH  [SFE_LOGO_NAME_FLAME_.1]  43.31,19.56 270 bottom
U$19  SFE_LOGO_NAME_FLAME.1_INCH  [SFE_LOGO_NAME_FLAME_.1]  56.39,27.05 90 top
U$20  [PWR-()-03]  43.56,47.5 0 top
U$21  [##V##1]  38.23,28.07 90 top
U$22  [##H##0]  42.8,34.54 0 top
U$23  [SDA0]  46.74,56.13 270 bottom
U$24  [SCL1]  49.28,56.13 270 bottom
U$25  [SCL3]  49.28,52.58 90 top
U$26  [SDA2]  46.74,52.32 90 top
U$27  [GND4]  41.66,51.82 90 top
U$28  [GND4]  41.66,56.26 270 bottom
U$29  [3V35]  44.2,52.07 90 top
U$30  [3V35]  44.2,56.26 270 bottom
U$31  [I2C_PU0]  34.42,52.32 270 bottom
U$32  [QWIIC_JOYSTICK1]  46.23,29.72 270 bottom
U$33  [QWIIC0]  34.04,25.91 90 top
U$34  [JOYSTICK0]  35.31,25.91 90 top
U$35  SFE_LOGO_NAME_FLAME.1_INCH  [SFE_LOGO_NAME_FLAME_.1]  69.22,19.56 270 bottom
U$36  SFE_LOGO_NAME_FLAME.1_INCH  [SFE_LOGO_NAME_FLAME_.1]  82.3,27.05 90 top
U$37  [PWR-()-03]  69.47,47.5 0 top
U$38  [##V##1]  64.14,28.07 90 top
U$39  [##H##0]  68.71,34.54 0 top
U$40  [SDA0]  72.64,56.13 270 bottom
U$41  [SCL1]  75.18,56.13 270 bottom
U$42  [SCL3]  75.18,52.58 90 top
U$43  [SDA2]  72.64,52.32 90 top
U$44  [GND4]  67.56,51.82 90 top
U$45  [GND4]  67.56,56.26 270 bottom
U$46  [3V35]  70.1,52.07 90 top
U$47  [3V35]  70.1,56.26 270 bottom
U$48  [I2C_PU0]  60.32,52.32 270 bottom
U$49  [QWIIC_JOYSTICK1]  72.14,29.72 270 bottom
U$50  [QWIIC0]  59.94,25.91 90 top
U$51  [JOYSTICK0]  61.21,25.91 90 top
U$52  SFE_LOGO_NAME_FLAME.1_INCH  [SFE_LOGO_NAME_FLAME_.1]  95.12,19.56 270 bottom
U$53  SFE_LOGO_NAME_FLAME.1_INCH  [SFE_LOGO_NAME_FLAME_.1]  108.2,27.05 90 top
U$54  [PWR-()-03]  95.38,47.5 0 top
U$55  [##V##1]  90.04,28.07 90 top
U$56  [##H##0]  94.62,34.54 0 top
U$57  [SDA0]  98.55,56.13 270 bottom
U$58  [SCL1]  101.09,56.13 270 bottom
U$59  [SCL3]  101.09,52.58 90 top
U$60  [SDA2]  98.55,52.32 90 top
U$61  [GND4]  93.47,51.82 90 top
U$62  [GND4]  93.47,56.26 270 bottom
U$63  [3V35]  96.01,52.07 90 top
U$64  [3V35]  96.01,56.26 270 bottom
U$65  [I2C_PU0]  86.23,52.32 270 bottom
U$66  [QWIIC_JOYSTICK1]  98.04,29.72 270 bottom
U$67  [QWIIC0]  85.85,25.91 90 top
U$68  [JOYSTICK0]  87.12,25.91 90 top
U$69  SFE_LOGO_NAME_FLAME.1_INCH  [SFE_LOGO_NAME_FLAME_.1]  17.4,70.87 270 bottom
U$70  SFE_LOGO_NAME_FLAME.1_INCH  [SFE_LOGO_NAME_FLAME_.1]  30.48,78.36 90 top
U$71  [PWR-()-03]  17.65,98.81 0 top
U$72  [##V##1]  12.32,79.38 90 top
U$73  [##H##0]  16.89,85.85 0 top
U$74  [SDA0]  20.83,107.44 270 bottom
U$75  [SCL1]  23.37,107.44 270 bottom
U$76  [SCL3]  23.37,103.89 90 top
U$77  [SDA2]  20.83,103.63 90 top
U$78  [GND4]  15.75,103.12 90 top
U$79  [GND4]  15.75,107.57 270 bottom
U$80  [3V35]  18.29,103.38 90 top
U$81  [3V35]  18.29,107.57 270 bottom
U$82  [I2C_PU0]  8.51,103.63 270 bottom
U$83  [QWIIC_JOYSTICK1]  20.32,81.03 270 bottom
U$84  [QWIIC0]  8.13,77.22 90 top
U$85  [JOYSTICK0]  9.4,77.22 90 top
U$86  SFE_LOGO_NAME_FLAME.1_INCH  [SFE_LOGO_NAME_FLAME_.1]  43.31,70.87 270 bottom
U$87  SFE_LOGO_NAME_FLAME.1_INCH  [SFE_LOGO_NAME_FLAME_.1]  56.39,78.36 90 top
U$88  [PWR-()-03]  43.56,98.81 0 top
U$89  [##V##1]  38.23,79.38 90 top
U$90  [##H##0]  42.8,85.85 0 top
U$91  [SDA0]  46.74,107.44 270 bottom
U$92  [SCL1]  49.28,107.44 270 bottom
U$93  [SCL3]  49.28,103.89 90 top
U$94  [SDA2]  46.74,103.63 90 top
U$95  [GND4]  41.66,103.12 90 top
U$96  [GND4]  41.66,107.57 270 bottom
U$97  [3V35]  44.2,103.38 90 top
U$98  [3V35]  44.2,107.57 270 bottom
U$99  [I2C_PU0]  34.42,103.63 270 bottom
U$100  [QWIIC_JOYSTICK1]  46.23,81.03 270 bottom
U$101  [QWIIC0]  34.04,77.22 90 top
U$102  [JOYSTICK0]  35.31,77.22 90 top
U$103  SFE_LOGO_NAME_FLAME.1_INCH  [SFE_LOGO_NAME_FLAME_.1]  69.22,70.87 270 bottom
U$104  SFE_LOGO_NAME_FLAME.1_INCH  [SFE_LOGO_NAME_FLAME_.1]  82.3,78.36 90 top
U$105  [PWR-()-03]  69.47,98.81 0 top
U$106  [##V##1]  64.14,79.38 90 top
U$107  [##H##0]  68.71,85.85 0 top
U$108  [SDA0]  72.64,107.44 270 bottom
U$109  [SCL1]  75.18,107.44 270 bottom
U$110  [SCL3]  75.18,103.89 90 top
U$111  [SDA2]  72.64,103.63 90 top
U$112  [GND4]  67.56,103.12 90 top
U$113  [GND4]  67.56,107.57 270 bottom
U$114  [3V35]  70.1,103.38 90 top
U$115  [3V35]  70.1,107.57 270 bottom
U$116  [I2C_PU0]  60.32,103.63 270 bottom
U$117  [QWIIC_JOYSTICK1]  72.14,81.03 270 bottom
U$118  [QWIIC0]  59.94,77.22 90 top
U$119  [JOYSTICK0]  61.21,77.22 90 top
U$120  SFE_LOGO_NAME_FLAME.1_INCH  [SFE_LOGO_NAME_FLAME_.1]  95.12,70.87 270 bottom
U$121  SFE_LOGO_NAME_FLAME.1_INCH  [SFE_LOGO_NAME_FLAME_.1]  108.2,78.36 90 top
U$122  [PWR-()-03]  95.38,98.81 0 top
U$123  [##V##1]  90.04,79.38 90 top
U$124  [##H##0]  94.62,85.85 0 top
U$125  [SDA0]  98.55,107.44 270 bottom
U$126  [SCL1]  101.09,107.44 270 bottom
U$127  [SCL3]  101.09,103.89 90 top
U$128  [SDA2]  98.55,103.63 90 top
U$129  [GND4]  93.47,103.12 90 top
U$130  [GND4]  93.47,107.57 270 bottom
U$131  [3V35]  96.01,103.38 90 top
U$132  [3V35]  96.01,107.57 270 bottom
U$133  [I2C_PU0]  86.23,103.63 270 bottom
U$134  [QWIIC_JOYSTICK1]  98.04,81.03 270 bottom
U$135  [QWIIC0]  85.85,77.22 90 top
U$136  [JOYSTICK0]  87.12,77.22 90 top
U$137  SFE_LOGO_NAME_FLAME.1_INCH  [SFE_LOGO_NAME_FLAME_.1]  17.4,122.17 270 bottom
U$138  SFE_LOGO_NAME_FLAME.1_INCH  [SFE_LOGO_NAME_FLAME_.1]  30.48,129.67 90 top
U$139  [PWR-()-03]  17.65,150.11 0 top
U$140  [##V##1]  12.32,130.68 90 top
U$141  [##H##0]  16.89,137.16 0 top
U$142  [SDA0]  20.83,158.75 270 bottom
U$143  [SCL1]  23.37,158.75 270 bottom
U$144  [SCL3]  23.37,155.19 90 top
U$145  [SDA2]  20.83,154.94 90 top
U$146  [GND4]  15.75,154.43 90 top
U$147  [GND4]  15.75,158.88 270 bottom
U$148  [3V35]  18.29,154.69 90 top
U$149  [3V35]  18.29,158.88 270 bottom
U$150  [I2C_PU0]  8.51,154.94 270 bottom
U$151  [QWIIC_JOYSTICK1]  20.32,132.33 270 bottom
U$152  [QWIIC0]  8.13,128.52 90 top
U$153  [JOYSTICK0]  9.4,128.52 90 top
U$154  SFE_LOGO_NAME_FLAME.1_INCH  [SFE_LOGO_NAME_FLAME_.1]  43.31,122.17 270 bottom
U$155  SFE_LOGO_NAME_FLAME.1_INCH  [SFE_LOGO_NAME_FLAME_.1]  56.39,129.67 90 top
U$156  [PWR-()-03]  43.56,150.11 0 top
U$157  [##V##1]  38.23,130.68 90 top
U$158  [##H##0]  42.8,137.16 0 top
U$159  [SDA0]  46.74,158.75 270 bottom
U$160  [SCL1]  49.28,158.75 270 bottom
U$161  [SCL3]  49.28,155.19 90 top
U$162  [SDA2]  46.74,154.94 90 top
U$163  [GND4]  41.66,154.43 90 top
U$164  [GND4]  41.66,158.88 270 bottom
U$165  [3V35]  44.2,154.69 90 top
U$166  [3V35]  44.2,158.88 270 bottom
U$167  [I2C_PU0]  34.42,154.94 270 bottom
U$168  [QWIIC_JOYSTICK1]  46.23,132.33 270 bottom
U$169  [QWIIC0]  34.04,128.52 90 top
U$170  [JOYSTICK0]  35.31,128.52 90 top
U$171  SFE_LOGO_NAME_FLAME.1_INCH  [SFE_LOGO_NAME_FLAME_.1]  69.22,122.17 270 bottom
U$172  SFE_LOGO_NAME_FLAME.1_INCH  [SFE_LOGO_NAME_FLAME_.1]  82.3,129.67 90 top
U$173  [PWR-()-03]  69.47,150.11 0 top
U$174  [##V##1]  64.14,130.68 90 top
U$175  [##H##0]  68.71,137.16 0 top
U$176  [SDA0]  72.64,158.75 270 bottom
U$177  [SCL1]  75.18,158.75 270 bottom
U$178  [SCL3]  75.18,155.19 90 top
U$179  [SDA2]  72.64,154.94 90 top
U$180  [GND4]  67.56,154.43 90 top
U$181  [GND4]  67.56,158.88 270 bottom
U$182  [3V35]  70.1,154.69 90 top
U$183  [3V35]  70.1,158.88 270 bottom
U$184  [I2C_PU0]  60.32,154.94 270 bottom
U$185  [QWIIC_JOYSTICK1]  72.14,132.33 270 bottom
U$186  [QWIIC0]  59.94,128.52 90 top
U$187  [JOYSTICK0]  61.21,128.52 90 top
U$188  SFE_LOGO_NAME_FLAME.1_INCH  [SFE_LOGO_NAME_FLAME_.1]  95.12,122.17 270 bottom
U$189  SFE_LOGO_NAME_FLAME.1_INCH  [SFE_LOGO_NAME_FLAME_.1]  108.2,129.67 90 top
U$190  [PWR-()-03]  95.38,150.11 0 top
U$191  [##V##1]  90.04,130.68 90 top
U$192  [##H##0]  94.62,137.16 0 top
U$193  [SDA0]  98.55,158.75 270 bottom
U$194  [SCL1]  101.09,158.75 270 bottom
U$195  [SCL3]  101.09,155.19 90 top
U$196  [SDA2]  98.55,154.94 90 top
U$197  [GND4]  93.47,154.43 90 top
U$198  [GND4]  93.47,158.88 270 bottom
U$199  [3V35]  96.01,154.69 90 top
U$200  [3V35]  96.01,158.88 270 bottom
U$201  [I2C_PU0]  86.23,154.94 270 bottom
U$202  [QWIIC_JOYSTICK1]  98.04,132.33 270 bottom
U$203  [QWIIC0]  85.85,128.52 90 top
U$204  [JOYSTICK0]  87.12,128.52 90 top
U$205  SFE_LOGO_NAME_FLAME.1_INCH  [SFE_LOGO_NAME_FLAME_.1]  17.4,173.48 270 bottom
U$206  SFE_LOGO_NAME_FLAME.1_INCH  [SFE_LOGO_NAME_FLAME_.1]  30.48,180.97 90 top
U$207  [PWR-()-03]  17.65,201.42 0 top
U$208  [##V##1]  12.32,181.99 90 top
U$209  [##H##0]  16.89,188.47 0 top
U$210  [SDA0]  20.83,210.06 270 bottom
U$211  [SCL1]  23.37,210.06 270 bottom
U$212  [SCL3]  23.37,206.5 90 top
U$213  [SDA2]  20.83,206.25 90 top
U$214  [GND4]  15.75,205.74 90 top
U$215  [GND4]  15.75,210.19 270 bottom
U$216  [3V35]  18.29,205.99 90 top
U$217  [3V35]  18.29,210.19 270 bottom
U$218  [I2C_PU0]  8.51,206.25 270 bottom
U$219  [QWIIC_JOYSTICK1]  20.32,183.64 270 bottom
U$220  [QWIIC0]  8.13,179.83 90 top
U$221  [JOYSTICK0]  9.4,179.83 90 top
U$222  SFE_LOGO_NAME_FLAME.1_INCH  [SFE_LOGO_NAME_FLAME_.1]  43.31,173.48 270 bottom
U$223  SFE_LOGO_NAME_FLAME.1_INCH  [SFE_LOGO_NAME_FLAME_.1]  56.39,180.97 90 top
U$224  [PWR-()-03]  43.56,201.42 0 top
U$225  [##V##1]  38.23,181.99 90 top
U$226  [##H##0]  42.8,188.47 0 top
U$227  [SDA0]  46.74,210.06 270 bottom
U$228  [SCL1]  49.28,210.06 270 bottom
U$229  [SCL3]  49.28,206.5 90 top
U$230  [SDA2]  46.74,206.25 90 top
U$231  [GND4]  41.66,205.74 90 top
U$232  [GND4]  41.66,210.19 270 bottom
U$233  [3V35]  44.2,205.99 90 top
U$234  [3V35]  44.2,210.19 270 bottom
U$235  [I2C_PU0]  34.42,206.25 270 bottom
U$236  [QWIIC_JOYSTICK1]  46.23,183.64 270 bottom
U$237  [QWIIC0]  34.04,179.83 90 top
U$238  [JOYSTICK0]  35.31,179.83 90 top
U$239  SFE_LOGO_NAME_FLAME.1_INCH  [SFE_LOGO_NAME_FLAME_.1]  69.22,173.48 270 bottom
U$240  SFE_LOGO_NAME_FLAME.1_INCH  [SFE_LOGO_NAME_FLAME_.1]  82.3,180.97 90 top
U$241  [PWR-()-03]  69.47,201.42 0 top
U$242  [##V##1]  64.14,181.99 90 top
U$243  [##H##0]  68.71,188.47 0 top
U$244  [SDA0]  72.64,210.06 270 bottom
U$245  [SCL1]  75.18,210.06 270 bottom
U$246  [SCL3]  75.18,206.5 90 top
U$247  [SDA2]  72.64,206.25 90 top
U$248  [GND4]  67.56,205.74 90 top
U$249  [GND4]  67.56,210.19 270 bottom
U$250  [3V35]  70.1,205.99 90 top
U$251  [3V35]  70.1,210.19 270 bottom
U$252  [I2C_PU0]  60.32,206.25 270 bottom
U$253  [QWIIC_JOYSTICK1]  72.14,183.64 270 bottom
U$254  [QWIIC0]  59.94,179.83 90 top
U$255  [JOYSTICK0]  61.21,179.83 90 top
U$256  SFE_LOGO_NAME_FLAME.1_INCH  [SFE_LOGO_NAME_FLAME_.1]  95.12,173.48 270 bottom
U$257  SFE_LOGO_NAME_FLAME.1_INCH  [SFE_LOGO_NAME_FLAME_.1]  108.2,180.97 90 top
U$258  [PWR-()-03]  95.38,201.42 0 top
U$259  [##V##1]  90.04,181.99 90 top
U$260  [##H##0]  94.62,188.47 0 top
U$261  [SDA0]  98.55,210.06 270 bottom
U$262  [SCL1]  101.09,210.06 270 bottom
U$263  [SCL3]  101.09,206.5 90 top
U$264  [SDA2]  98.55,206.25 90 top
U$265  [GND4]  93.47,205.74 90 top
U$266  [GND4]  93.47,210.19 270 bottom
U$267  [3V35]  96.01,205.99 90 top
U$268  [3V35]  96.01,210.19 270 bottom
U$269  [I2C_PU0]  86.23,206.25 270 bottom
U$270  [QWIIC_JOYSTICK1]  98.04,183.64 270 bottom
U$271  [QWIIC0]  85.85,179.83 90 top
U$272  [JOYSTICK0]  87.12,179.83 90 top

## Library data of the parts
C1-C16 = SparkFun-Capacitors; PROD_ID: CAP-00810
D1-D16 = SparkFun-LED; PROD_ID: DIO-00819
E$1 E$2 LOGO1-LOGO32 U$1 U$2 U$18 U$19 U$35 U$36 U$52 U$53 U$69 U$70 U$86 U$87 U$103 U$104 U$120 U$121 U$137 U$138 U$154 U$155 U$171 U$172 U$188 U$189 U$205 U$206 U$222 U$223 U$239 U$240 U$256 U$257 = SparkFun-Aesthetics
E$3 = SparkFun-Retired
H1-H96 = SparkFun-Hardware
J1 J3 J4 J7 J9 J11 J13 J15 J17 J19 J21 J23 J25 J27 J29 J31 J33 J35 J37 J39 J41 J43 J45 J47 J49 J51 J53 J55 J57 J59 J61 J63 = SparkFun-Connectors; PROD_ID: CONN-13694
J2 J5 J10 J14 J18 J22 J26 J30 J34 J38 J42 J46 J50 J54 J58 J62 = SparkFun-Connectors; PROD_ID: CONN-09696
J6 J8 J12 J16 J20 J24 J28 J32 J36 J40 J44 J48 J52 J56 J60 J64 = SparkFun-Connectors
JP1-JP6 JP8 JP9 JP11-JP14 JP16-JP19 JP21-JP24 JP26-JP29 JP31-JP34 JP36-JP39 JP41-JP44 JP46-JP49 JP51-JP54 JP56-JP59 JP61-JP64 JP66-JP69 JP71-JP74 JP76-JP79 = SparkFun
JP7 JP10 JP15 JP20 JP25 JP30 JP35 JP40 JP45 JP50 JP55 JP60 JP65 JP70 JP75 JP80 = SparkFun-Jumpers
R1 R2 R4 R7 R9 R11 R13 R15 R17 R19 R21 R23 R25 R27 R29 R31 R33 R35 R37 R39 R41 R43 R45 R47 R49 R51 R53 R55 R57 R59 R61 R63 = SparkFun-Resistors; PROD_ID: RES-08272
R3 R6 R10 R14 R18 R22 R26 R30 R34 R38 R42 R46 R50 R54 R58 R62 = SparkFun-Resistors; PROD_ID: RES-07856
R5 R8 R12 R16 R20 R24 R28 R32 R36 R40 R44 R48 R52 R56 R60 R64 = SparkFun-Resistors; PROD_ID: RES-00824
S1-S16 = SparkFun-Switches; PROD_ID: COMP-09744; SF_SKU: COM-09032
U1-U16 = SparkFun-IC-Microcontroller; PROD_ID: IC-09092
U$3 U$33 U$50 U$67 U$84 U$101 U$118 U$135 U$152 U$169 U$186 U$203 U$220 U$237 U$254 U$271 = buzzard_labels (19)
U$4 U$31 U$48 U$65 U$82 U$99 U$116 U$133 U$150 U$167 U$184 U$201 U$218 U$235 U$252 U$269 = buzzard_labels (6)
U$5 U$9 U$11 U$12 U$23-U$26 U$40-U$43 U$57-U$60 U$74-U$77 U$91-U$94 U$108-U$111 U$125-U$128 U$142-U$145 U$159-U$162 U$176-U$179 U$193-U$196 U$210-U$213 U$227-U$230 U$244-U$247 U$261-U$264 = buzzard_labels (3)
U$6 U$8 U$16 U$17 U$27-U$30 U$44-U$47 U$61-U$64 U$78-U$81 U$95-U$98 U$112-U$115 U$129-U$132 U$146-U$149 U$163-U$166 U$180-U$183 U$197-U$200 U$214-U$217 U$231-U$234 U$248-U$251 U$265-U$268 = buzzard_labels (5)
U$7 U$15 U$21 U$22 U$38 U$39 U$55 U$56 U$72 U$73 U$89 U$90 U$106 U$107 U$123 U$124 U$140 U$141 U$157 U$158 U$174 U$175 U$191 U$192 U$208 U$209 U$225 U$226 U$242 U$243 U$259 U$260 = buzzard_labels (22)
U$10 U$13 U$32 U$34 U$49 U$51 U$66 U$68 U$83 U$85 U$100 U$102 U$117 U$119 U$134 U$136 U$151 U$153 U$168 U$170 U$185 U$187 U$202 U$204 U$219 U$221 U$236 U$238 U$253 U$255 U$270 U$272 = buzzard_labels (20)
U$14 U$20 U$37 U$54 U$71 U$88 U$105 U$122 U$139 U$156 U$173 U$190 U$207 U$224 U$241 U$258 = Labels

## Nets
3.3V: C4.1 J1.2 J2.3 J4.2 J6.2 JP7.2 R6.2 R8.1 S1.H1 S1.V1 U2.8
3.3V1: C1.1 J3.2 J5.3 J7.2 J8.2 JP10.2 R3.2 R5.1 S2.H1 S2.V1 U1.8
3.3V2: C2.1 J9.2 J10.3 J11.2 J12.2 JP15.2 R10.2 R12.1 S3.H1 S3.V1 U3.8
3.3V3: C3.1 J13.2 J14.3 J15.2 J16.2 JP20.2 R14.2 R16.1 S4.H1 S4.V1 U4.8
3.3V4: C5.1 J17.2 J18.3 J19.2 J20.2 JP25.2 R18.2 R20.1 S5.H1 S5.V1 U5.8
3.3V5: C6.1 J21.2 J22.3 J23.2 J24.2 JP30.2 R22.2 R24.1 S6.H1 S6.V1 U6.8
3.3V6: C7.1 J25.2 J26.3 J27.2 J28.2 JP35.2 R26.2 R28.1 S7.H1 S7.V1 U7.8
3.3V7: C8.1 J29.2 J30.3 J31.2 J32.2 JP40.2 R30.2 R32.1 S8.H1 S8.V1 U8.8
3.3V8: C9.1 J33.2 J34.3 J35.2 J36.2 JP45.2 R34.2 R36.1 S9.H1 S9.V1 U9.8
3.3V9: C10.1 J37.2 J38.3 J39.2 J40.2 JP50.2 R38.2 R40.1 S10.H1 S10.V1 U10.8
3.3V10: C11.1 J41.2 J42.3 J43.2 J44.2 JP55.2 R42.2 R44.1 S11.H1 S11.V1 U11.8
3.3V11: C12.1 J45.2 J46.3 J47.2 J48.2 JP60.2 R46.2 R48.1 S12.H1 S12.V1 U12.8
3.3V12: C13.1 J49.2 J50.3 J51.2 J52.2 JP65.2 R50.2 R52.1 S13.H1 S13.V1 U13.8
3.3V13: C14.1 J53.2 J54.3 J55.2 J56.2 JP70.2 R54.2 R56.1 S14.H1 S14.V1 U14.8
3.3V14: C15.1 J57.2 J58.3 J59.2 J60.2 JP75.2 R58.2 R60.1 S15.H1 S15.V1 U15.8
3.3V15: C16.1 J61.2 J62.3 J63.2 J64.2 JP80.2 R62.2 R64.1 S16.H1 S16.V1 U16.8
!RST: J6.5 R8.2 U2.1
!RST1: J8.5 R5.2 U1.1
!RST2: J12.5 R12.2 U3.1
!RST3: J16.5 R16.2 U4.1
!RST4: J20.5 R20.2 U5.1
!RST5: J24.5 R24.2 U6.1
!RST6: J28.5 R28.2 U7.1
!RST7: J32.5 R32.2 U8.1
!RST8: J36.5 R36.2 U9.1
!RST9: J40.5 R40.2 U10.1
!RST10: J44.5 R44.2 U11.1
!RST11: J48.5 R48.2 U12.1
!RST12: J52.5 R52.2 U13.1
!RST13: J56.5 R56.2 U14.1
!RST14: J60.5 R60.2 U15.1
!RST15: J64.5 R64.2 U16.1
GND: C4.2 D1.C J1.1 J2.4 J4.1 J6.6 S1.B2A S1.H3 S1.V3 U2.4
GND1: C1.2 D2.C J3.1 J5.4 J7.1 J8.6 S2.B2A S2.H3 S2.V3 U1.4
GND2: C2.2 D3.C J9.1 J10.4 J11.1 J12.6 S3.B2A S3.H3 S3.V3 U3.4
GND3: C3.2 D4.C J13.1 J14.4 J15.1 J16.6 S4.B2A S4.H3 S4.V3 U4.4
GND4: C5.2 D5.C J17.1 J18.4 J19.1 J20.6 S5.B2A S5.H3 S5.V3 U5.4
GND5: C6.2 D6.C J21.1 J22.4 J23.1 J24.6 S6.B2A S6.H3 S6.V3 U6.4
GND6: C7.2 D7.C J25.1 J26.4 J27.1 J28.6 S7.B2A S7.H3 S7.V3 U7.4
GND7: C8.2 D8.C J29.1 J30.4 J31.1 J32.6 S8.B2A S8.H3 S8.V3 U8.4
GND8: C9.2 D9.C J33.1 J34.4 J35.1 J36.6 S9.B2A S9.H3 S9.V3 U9.4
GND9: C10.2 D10.C J37.1 J38.4 J39.1 J40.6 S10.B2A S10.H3 S10.V3 U10.4
GND10: C11.2 D11.C J41.1 J42.4 J43.1 J44.6 S11.B2A S11.H3 S11.V3 U11.4
GND11: C12.2 D12.C J45.1 J46.4 J47.1 J48.6 S12.B2A S12.H3 S12.V3 U12.4
GND12: C13.2 D13.C J49.1 J50.4 J51.1 J52.6 S13.B2A S13.H3 S13.V3 U13.4
GND13: C14.2 D14.C J53.1 J54.4 J55.1 J56.6 S14.B2A S14.H3 S14.V3 U14.4
GND14: C15.2 D15.C J57.1 J58.4 J59.1 J60.6 S15.B2A S15.H3 S15.V3 U15.4
GND15: C16.2 D16.C J61.1 J62.4 J63.1 J64.6 S16.B2A S16.H3 S16.V3 U16.4
HORIZONTAL: S1.H2 U2.3
HORIZONTAL1: S2.H2 U1.3
HORIZONTAL2: S3.H2 U3.3
HORIZONTAL3: S4.H2 U4.3
HORIZONTAL4: S5.H2 U5.3
HORIZONTAL5: S6.H2 U6.3
HORIZONTAL6: S7.H2 U7.3
HORIZONTAL7: S8.H2 U8.3
HORIZONTAL8: S9.H2 U9.3
HORIZONTAL9: S10.H2 U10.3
HORIZONTAL10: S11.H2 U11.3
HORIZONTAL11: S12.H2 U12.3
HORIZONTAL12: S13.H2 U13.3
HORIZONTAL13: S14.H2 U14.3
HORIZONTAL14: S15.H2 U15.3
HORIZONTAL15: S16.H2 U16.3
MISO/6/SELECT: J6.1 S1.B1A U2.6
MISO/6/SELECT1: J8.1 S2.B1A U1.6
MISO/6/SELECT2: J12.1 S3.B1A U3.6
MISO/6/SELECT3: J16.1 S4.B1A U4.6
MISO/6/SELECT4: J20.1 S5.B1A U5.6
MISO/6/SELECT5: J24.1 S6.B1A U6.6
MISO/6/SELECT6: J28.1 S7.B1A U7.6
MISO/6/SELECT7: J32.1 S8.B1A U8.6
MISO/6/SELECT8: J36.1 S9.B1A U9.6
MISO/6/SELECT9: J40.1 S10.B1A U10.6
MISO/6/SELECT10: J44.1 S11.B1A U11.6
MISO/6/SELECT11: J48.1 S12.B1A U12.6
MISO/6/SELECT12: J52.1 S13.B1A U13.6
MISO/6/SELECT13: J56.1 S14.B1A U14.6
MISO/6/SELECT14: J60.1 S15.B1A U15.6
MISO/6/SELECT15: J64.1 S16.B1A U16.6
N$1: D1.A R6.1
N$2: JP7.1 R7.2
N$3: JP7.3 R1.2
N$4: D2.A R3.1
N$5: JP10.1 R4.2
N$6: JP10.3 R2.2
N$7: D3.A R10.1
N$8: JP15.1 R11.2
N$9: JP15.3 R9.2
N$10: D4.A R14.1
N$11: JP20.1 R15.2
N$12: JP20.3 R13.2
N$13: D5.A R18.1
N$14: JP25.1 R19.2
N$15: JP25.3 R17.2
N$16: D6.A R22.1
N$17: JP30.1 R23.2
N$18: JP30.3 R21.2
N$19: D7.A R26.1
N$20: JP35.1 R27.2
N$21: JP35.3 R25.2
N$22: D8.A R30.1
N$23: JP40.1 R31.2
N$24: JP40.3 R29.2
N$25: D9.A R34.1
N$26: JP45.1 R35.2
N$27: JP45.3 R33.2
N$28: D10.A R38.1
N$29: JP50.1 R39.2
N$30: JP50.3 R37.2
N$31: D11.A R42.1
N$32: JP55.1 R43.2
N$33: JP55.3 R41.2
N$34: D12.A R46.1
N$35: JP60.1 R47.2
N$36: JP60.3 R45.2
N$37: D13.A R50.1
N$38: JP65.1 R51.2
N$39: JP65.3 R49.2
N$40: D14.A R54.1
N$41: JP70.1 R55.2
N$42: JP70.3 R53.2
N$43: D15.A R58.1
N$44: JP75.1 R59.2
N$45: JP75.3 R57.2
N$46: D16.A R62.1
N$47: JP80.1 R63.2
N$48: JP80.3 R61.2
SCL: J1.4 J2.1 J4.4 J6.3 R1.1 U2.7
SCL1: J3.4 J5.1 J7.4 J8.3 R2.1 U1.7
SCL2: J9.4 J10.1 J11.4 J12.3 R9.1 U3.7
SCL3: J13.4 J14.1 J15.4 J16.3 R13.1 U4.7
SCL4: J17.4 J18.1 J19.4 J20.3 R17.1 U5.7
SCL5: J21.4 J22.1 J23.4 J24.3 R21.1 U6.7
SCL6: J25.4 J26.1 J27.4 J28.3 R25.1 U7.7
SCL7: J29.4 J30.1 J31.4 J32.3 R29.1 U8.7
SCL8: J33.4 J34.1 J35.4 J36.3 R33.1 U9.7
SCL9: J37.4 J38.1 J39.4 J40.3 R37.1 U10.7
SCL10: J41.4 J42.1 J43.4 J44.3 R41.1 U11.7
SCL11: J45.4 J46.1 J47.4 J48.3 R45.1 U12.7
SCL12: J49.4 J50.1 J51.4 J52.3 R49.1 U13.7
SCL13: J53.4 J54.1 J55.4 J56.3 R53.1 U14.7
SCL14: J57.4 J58.1 J59.4 J60.3 R57.1 U15.7
SCL15: J61.4 J62.1 J63.4 J64.3 R61.1 U16.7
SDA: J1.3 J2.2 J4.3 J6.4 R7.1 U2.5
SDA1: J3.3 J5.2 J7.3 J8.4 R4.1 U1.5
SDA2: J9.3 J10.2 J11.3 J12.4 R11.1 U3.5
SDA3: J13.3 J14.2 J15.3 J16.4 R15.1 U4.5
SDA4: J17.3 J18.2 J19.3 J20.4 R19.1 U5.5
SDA5: J21.3 J22.2 J23.3 J24.4 R23.1 U6.5
SDA6: J25.3 J26.2 J27.3 J28.4 R27.1 U7.5
SDA7: J29.3 J30.2 J31.3 J32.4 R31.1 U8.5
SDA8: J33.3 J34.2 J35.3 J36.4 R35.1 U9.5
SDA9: J37.3 J38.2 J39.3 J40.4 R39.1 U10.5
SDA10: J41.3 J42.2 J43.3 J44.4 R43.1 U11.5
SDA11: J45.3 J46.2 J47.3 J48.4 R47.1 U12.5
SDA12: J49.3 J50.2 J51.3 J52.4 R51.1 U13.5
SDA13: J53.3 J54.2 J55.3 J56.4 R55.1 U14.5
SDA14: J57.3 J58.2 J59.3 J60.4 R59.1 U15.5
SDA15: J61.3 J62.2 J63.3 J64.4 R63.1 U16.5
VERTICAL: S1.V2 U2.2
VERTICAL1: S2.V2 U1.2
VERTICAL2: S3.V2 U3.2
VERTICAL3: S4.V2 U4.2
VERTICAL4: S5.V2 U5.2
VERTICAL5: S6.V2 U6.2
VERTICAL6: S7.V2 U7.2
VERTICAL7: S8.V2 U8.2
VERTICAL8: S9.V2 U9.2
VERTICAL9: S10.V2 U10.2
VERTICAL10: S11.V2 U11.2
VERTICAL11: S12.V2 U12.2
VERTICAL12: S13.V2 U13.2
VERTICAL13: S14.V2 U14.2
VERTICAL14: S15.V2 U15.2
VERTICAL15: S16.V2 U16.2